# Altium PCB main.PcbDoc
Units mm, origin at the board's own origin, x right, y up, seen from the top; angles counter-clockwise.
Board outline 45 x 45 mm, 2 copper layers (Top Layer, Bottom Layer); 4 components, 8 nets, 17 pads, 2 vias.
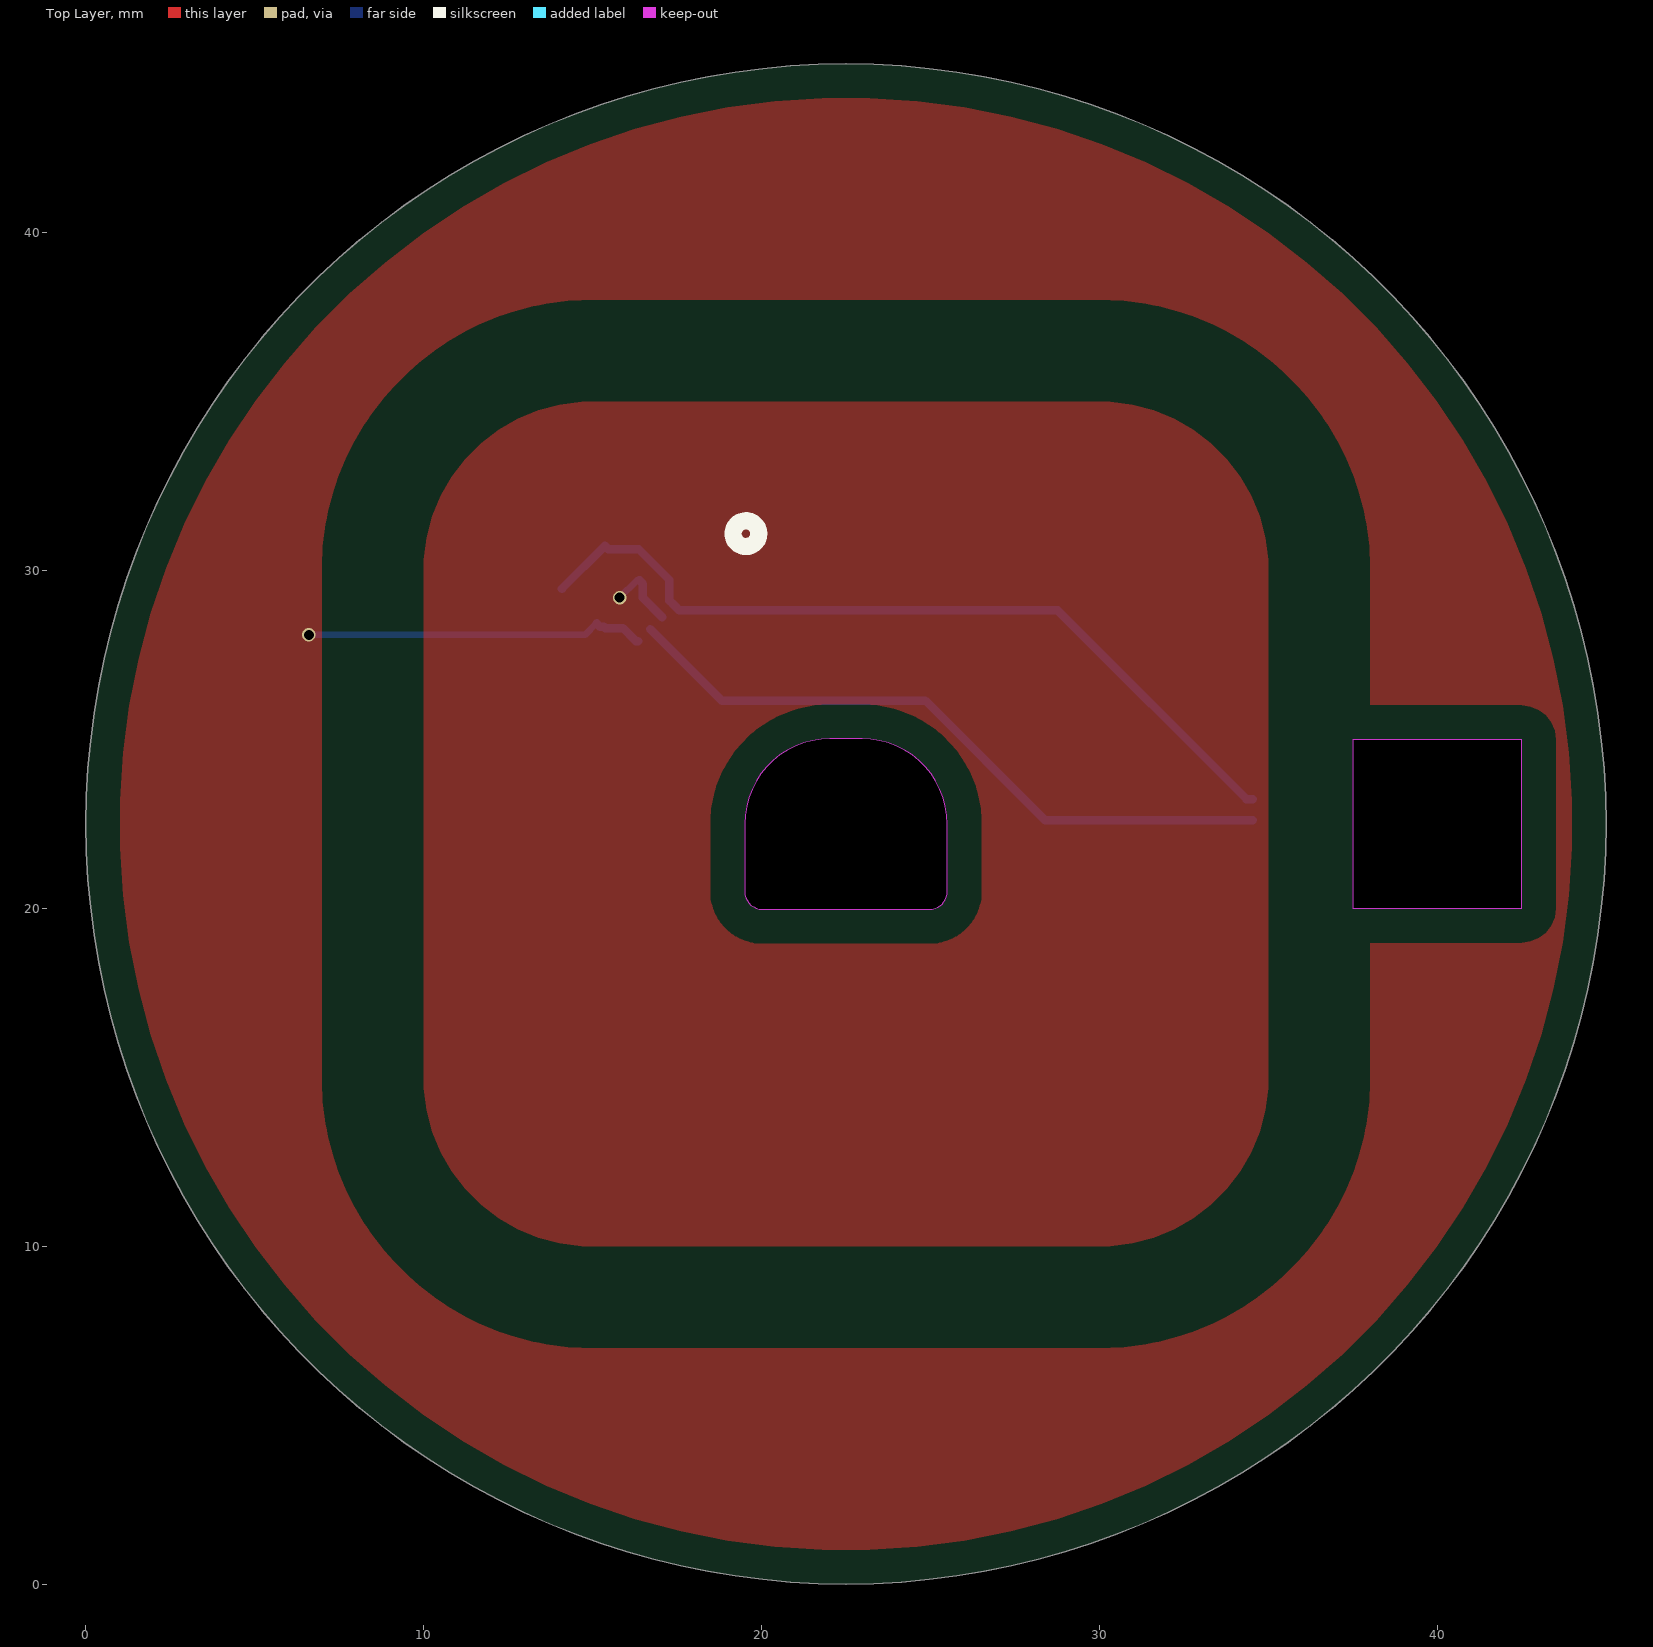
[diagram p0: Top Layer view]
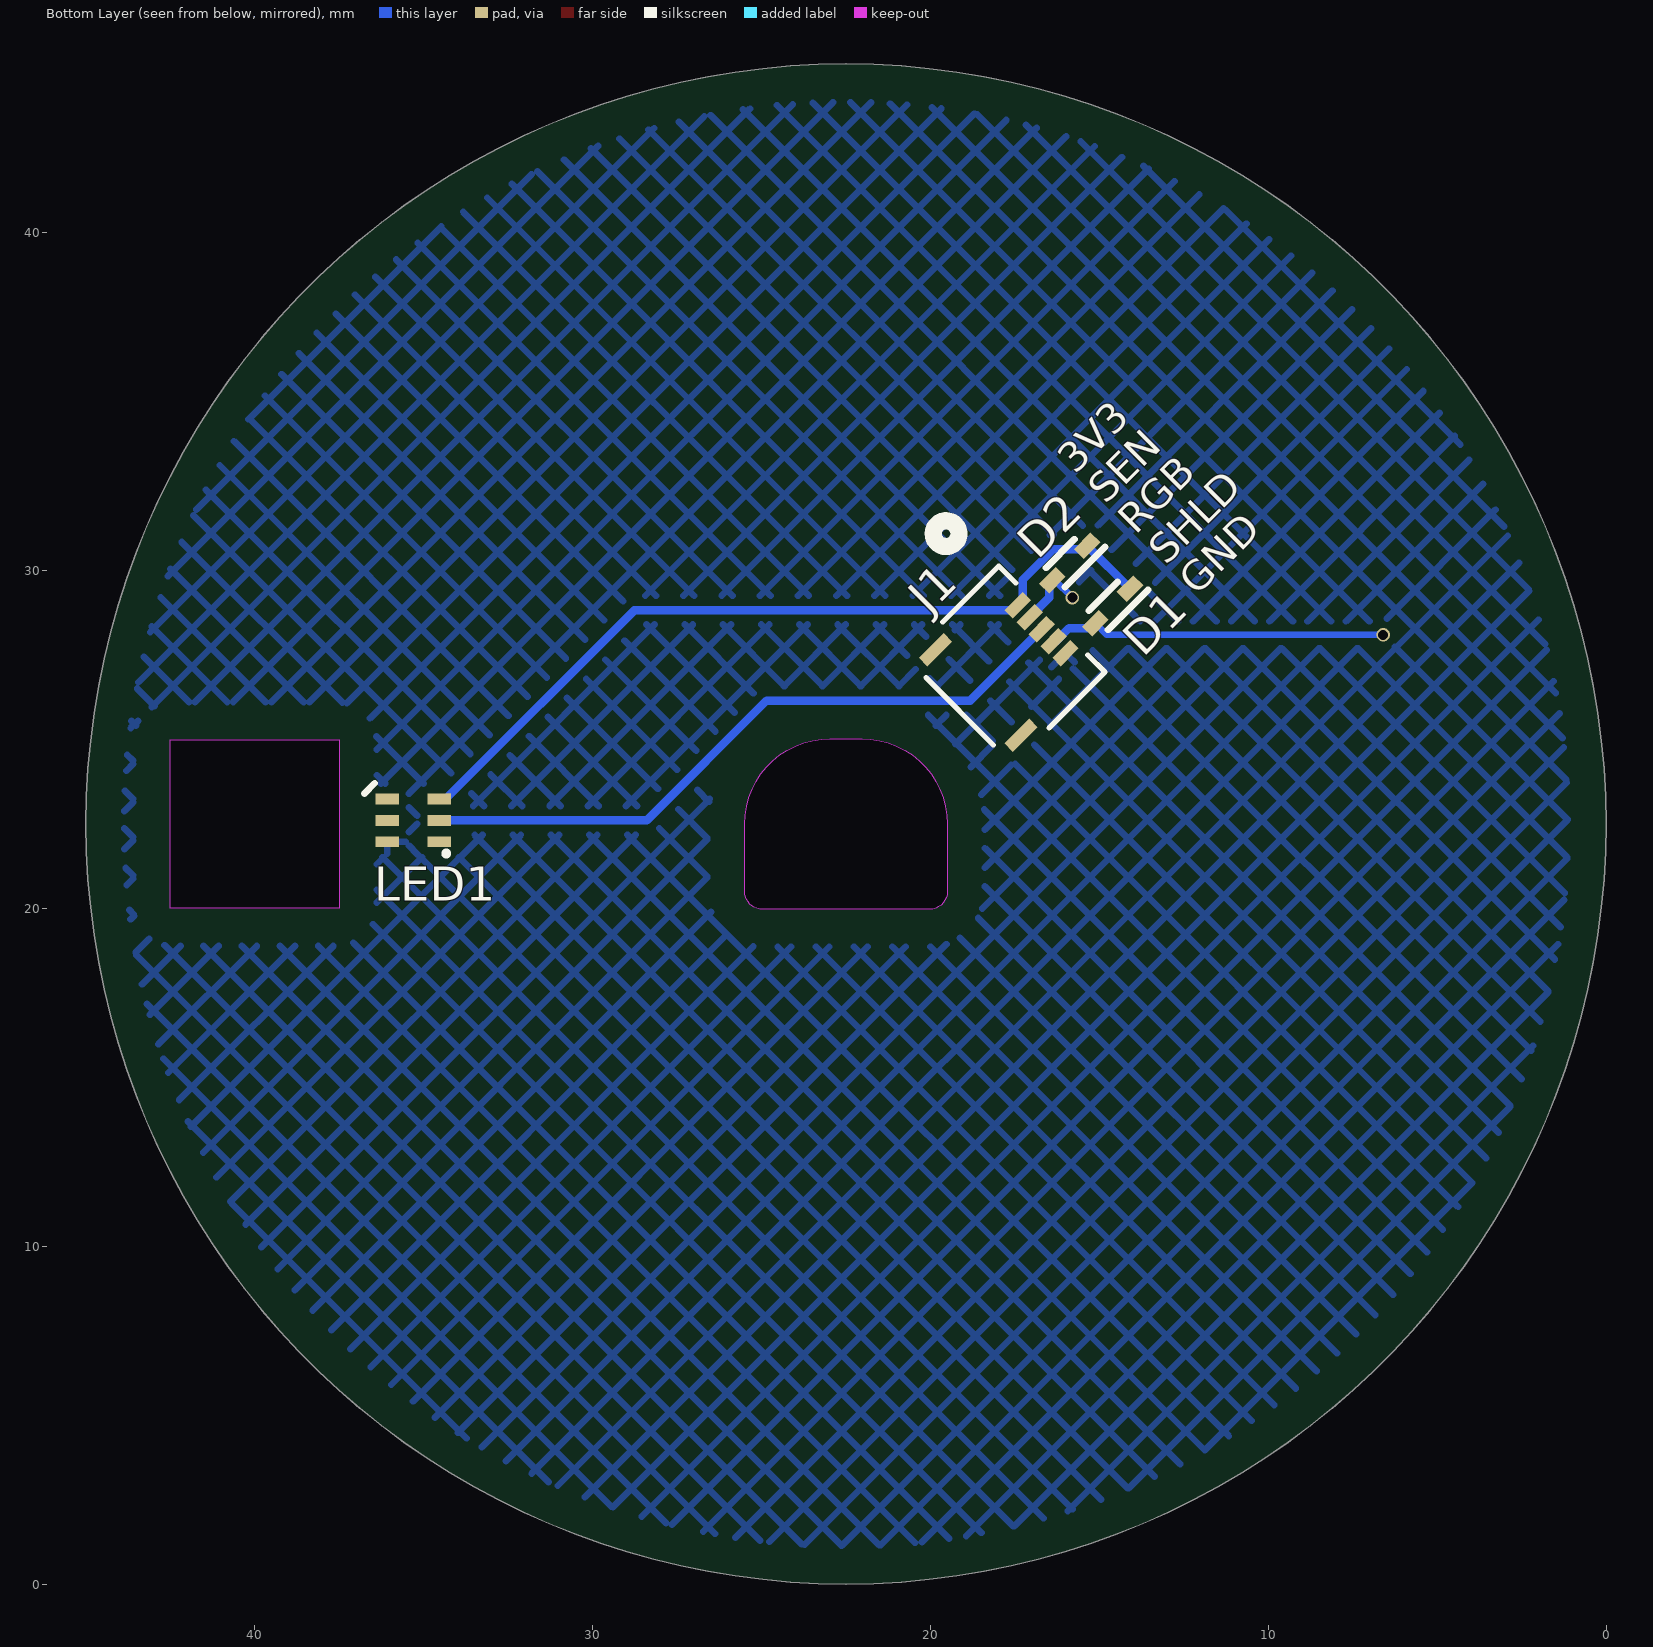
[diagram p1: Bottom Layer view, seen from below]
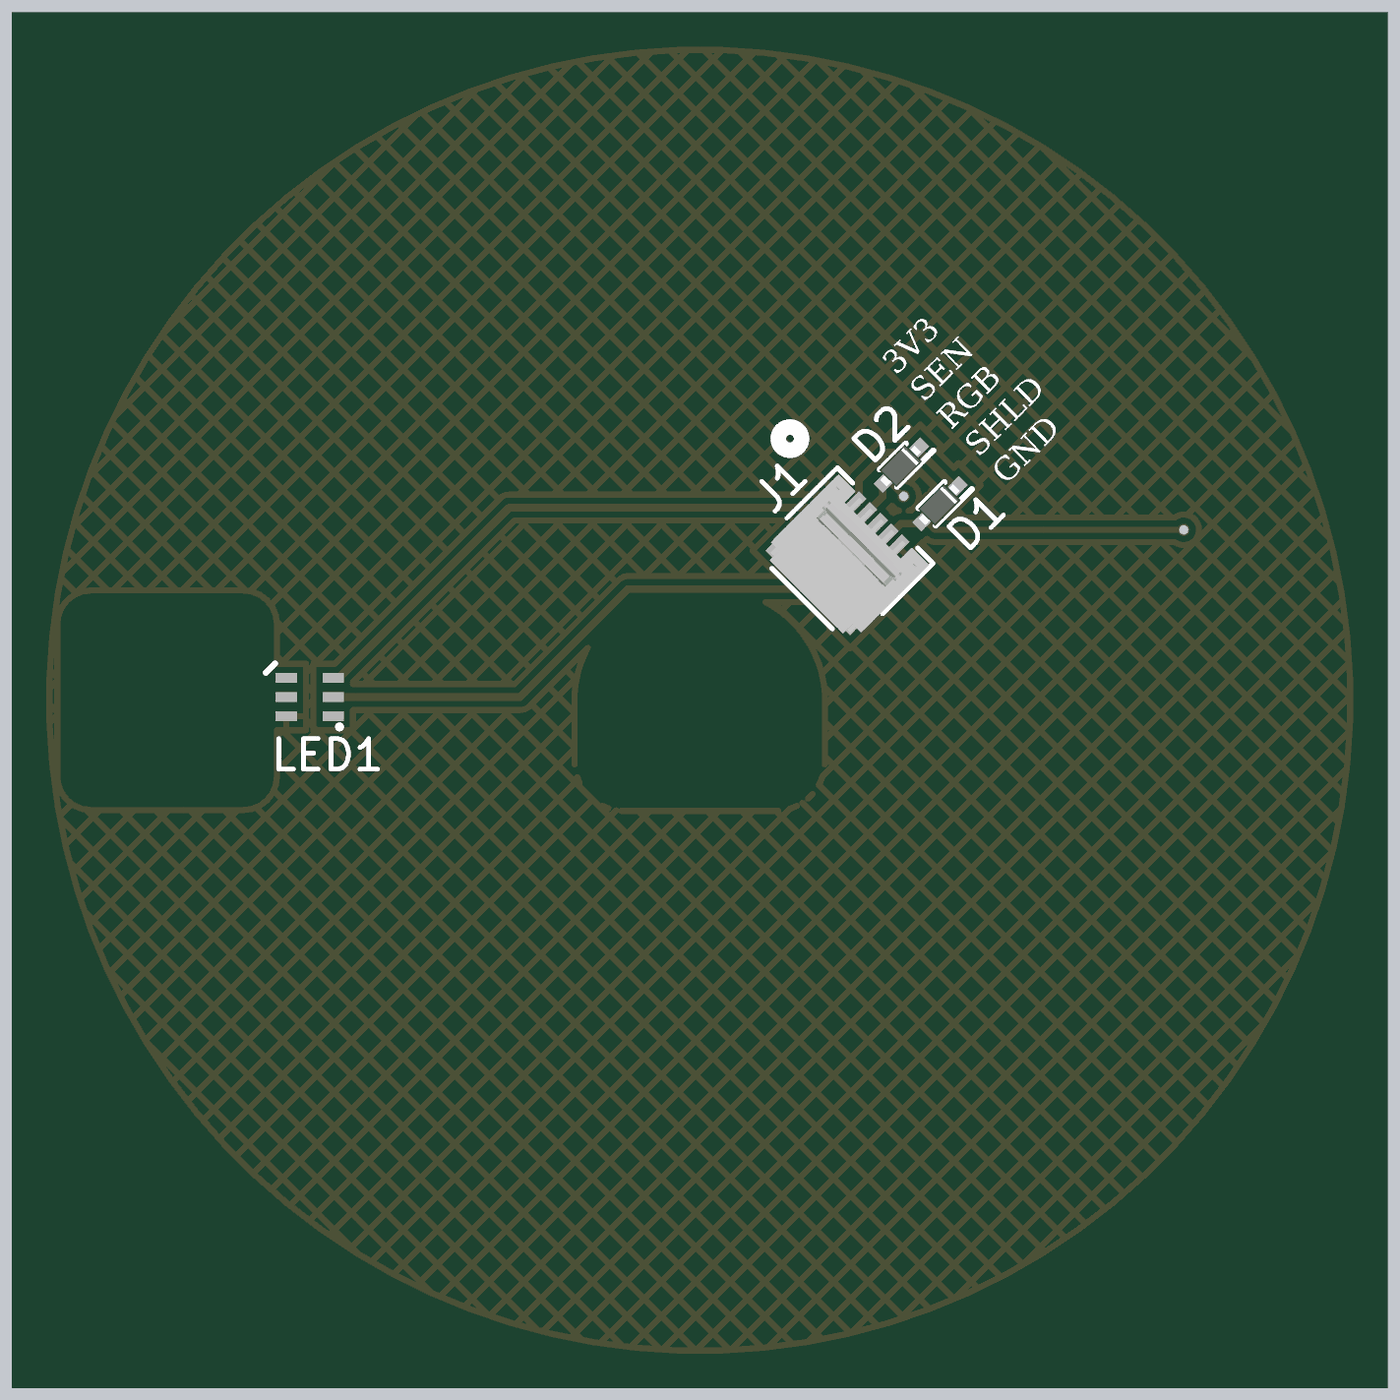
[diagram p2: 3D render of the assembled board from below, using the file's embedded part models]

## Layer stack, top to bottom
Top Solder: solder mask 0.0102, Solder Resist, Dk 3.5
Top Layer: signal copper 0.0356
Dielectric 1: dielectric 0.32, FR-4, Dk 4.8
Bottom Layer: signal copper 0.0356
Bottom Solder: solder mask 0.0102, Solder Resist, Dk 3.5

## Board outline
22.5,0 ccw(c22.5,22.5) 45,22.5 ccw(c22.5,22.5) 22.5,45 ccw(c22.5,22.5) 0,22.5 ccw(c22.5,22.5)
cut-out: 19.5,22.5 19.5,20.5 ccw(c20.025,20.5) 20.025,19.975 24.975,19.975 ccw(c24.975,20.5) 25.5,20.5 25.5,22.5 ccw(c22.975,22.5) 22.975,25.025 22.025,25.025 ccw(c22.025,22.5)
cut-out: 37.5,25 37.5,20 42.5,20 42.5,25

## Design rules (kind name [scope] priority, off if disabled: settings)
BoardOutlineClearance [All] p1: gap=1 ignorepadtopadclearanceinfootprint=FALSE
Clearance Clearance_sensor_shield [InNet('TSC_SEN') vs InNet('TSC_SHLD')] p1: gap=0.2 ignorepadtopadclearanceinfootprint=TRUE except(0.15: SMDPad-SMDPad; 0.28: Arc-THPad Arc-Hole Track-THPad Track-Hole; 0.3: THPad-Fill THPad-Poly THPad-Region; 0.4: Arc-Arc Arc-Track Track-Track; 0.45: THPad-THPad; 2: Arc-Fill Arc-Poly Arc-Region Track-Fill Track-Poly Track-Region; 3: Fill-Fill Fill-Poly Fill-Region Poly-Poly Poly-Region Region-Region)
Clearance [All] p2: gap=0.2 ignorepadtopadclearanceinfootprint=TRUE except(0.1: Track-Track Track-SMDPad; 0.15: SMDPad-SMDPad; 0.28: Track-THPad Track-Hole; 0.3: THPad-Fill THPad-Poly THPad-Region; 0.45: THPad-THPad)
HoleSize [All] p1: absolutevalues=TRUE maxlimit=6.3 minlimit=0.15 maxpercent=80.000 minpercent=20.000
MinimumAnnularRing [not isvia] p1: minimumring=0.2
MinimumSolderMaskSliver [All] p1: minsoldermaskwidth=0.1
PlaneClearance [All] p1: clearance=0.3
PlaneConnect [All] p1: pad.planeconnectstyle=Relief pad.reliefexpansion=0.2 pad.reliefentries=4 pad.reliefconductorwidth=0.3 pad.reliefairgap=0.3 via.planeconnectstyle=Direct via.reliefexpansion=0.508 via.reliefentries=4 via.reliefconductorwidth=0.254 via.reliefairgap=0.254
PolygonConnect [All] p1: thpad.connectstyle=Relief thpad.reliefconductorwidth=0.2 thpad.reliefentries=4 thpad.polygonreliefangle="90 Angle" thpad.airgapwidth=0.2 thpad.conductorbypadedge=TRUE thpad.mindistance=0.381 thpad.enablemindistance=FALSE smdpad.connectstyle=Relief smdpad.reliefconductorwidth=0.2 smdpad.reliefentries=4 smdpad.polygonreliefangle="90 Angle" smdpad.airgapwidth=0.2 smdpad.conductorbypadedge=TRUE smdpad.mindistance=0.381 smdpad.enablemindistance=FALSE via.connectstyle=Direct via.reliefconductorwidth=0.2 via.reliefentries=4 via.polygonreliefangle="90 Angle" via.airgapwidth=0.2
RoutingVias [All] p1: holewidth=0.3 width=0.5 viastyle="Through Hole" minholewidth=0.15 minwidth=0.25 maxholewidth=0.711 maxwidth=1.27
SilkToSilkClearance [All] p1: silktosilkclearance=0
SilkToSolderMaskClearance [IsPad] p1: minsilkscreentomaskgap=0.15 clearancetoexposedcopper=FALSE
SolderMaskExpansion SolderMaskExpansionVia [IsVia] p1: expansion=0 istentingtop=TRUE
SolderMaskExpansion [All] p2: expansion=0 istentingtop=FALSE
SupplyNets "Schematic Supply Nets_3" [InNet('3V3')] p1: voltage=0.000
SupplyNets "Schematic Supply Nets" [InNet('GND')] p2: voltage=0.000
Width [All] p1: maxlimit=1 minlimit=0.1 preferedwidth=0.2
24 further rules are at their usual default settings.

## Components (designator, comment, footprint, x,y, rotation, side; value= is the part's Value field where it differs from the comment)
D1 "BAS70KFILM" SODFL1608X70N 14.605,28.956 r315 bottom
D2 "BAS70KFILM" SODFL1608X70N 15.875,30.226 r315 bottom
J1 "5034800540" CONN_503480-0540_MOL 17.772,27.203 r225 bottom
LED1 "WS2816A-2121" ws2816a-2121 34.194,24.976 r0 bottom

## Footprints (in the part's own frame and the unit in brackets; to place one, negate y for a bottom-side part, rotate by r counter-clockwise, add the part's x,y. Pads: shape width x height; smd on the part's side, far side on the other; paste and mask are expansions set on the pad)
CONN_503480-0540_MOL [mil]
  rect 14x30 smd paste+0 mask+0: 1(-39.37,59.19) 2(-19.69,59.19) 3(0,59.19) 4(19.68,59.19) 5(39.37,59.19)
  rect 14x41 smd: 6(-70.47,-45.14) 7(70.47,-45.14)
  silkscreen extent -172,-76 87,76, body extent -80,-71 85,71, height 73
SODFL1608X70N [mm]
  rect 0.7x0.42 smd: 1(-0.725,0) 2(0.725,0)
  silkscreen extent -1.07,-0.4 0.6,0.4, body extent -0.76,-0.4 0.84,0.4, height 0.7
ws2816a-2121 [mm]
  rect 0.7x0.32 smd: 1(0.35,3) 2(0.35,2.37) 3(0.35,1.74) 4(1.89,1.74) 5(1.89,2.37) 6(1.89,3)
  silkscreen extent 0.12,1.27 2.56,3.37

## Part data
D1 D2: "STMicroelectronics BAS70KFILM, SMT Schottky Diode, 70V 70mA, 2-Pin SOD-523", Manufacturer_Name=STMicroelectronics, Mouser Part Number=511-BAS70KFILM, Arrow Part Number=BAS70KFILM, Arrow Price/Stock=https://www.arrow.com/en/products/bas70kfilm/stmicroelectronics?region=nac, Datasheet Link=https://www.st.com/resource/en/datasheet/bas70.pdf, Geometry.Height=0.7mm, Manufacturer_Part_Number=BAS70KFILM, Mouser Price/Stock=https://www.mouser.co.uk/ProductDetail/STMicroelectronics/BAS70KFILM?qs=jZi1jxfVU95GtldeDT2NyQ%3D%3D
J1: "Easy-On FFC/FPC Connector, 0.50mm Pitch, FBH1 Series, Right-Angle, Dual Contact, 1.00mm Height, 5 Circuits, Gold over Nickel Plating", Manufacturer_Name="Molex Connector Corporation", Copyright="Copyright (C) 2025 Ultra Librarian. All rights reserved.", Manufacturer_Part_Number=5034800540, RefDes=RefDes, Type=Type
LED1: Manufacturer_Part_Number=WS2816A-2121

## Via types
v1: diameter 0.4, hole 0.3, Top Layer to Bottom Layer, tented both sides, 2 vias

## Nets (pads, with @x,y where several pads share a name; then routed paths per layer and width w, separated by ;. In a path a pad name is that pad's centre, name@x,y a point inside that pad or via, vN(x,y) a via of type N, cw(c..) or ccw(c..) an arc to the next point about the centre after c; other vN are vias at no path point)
3V3: D1.1 D2.1 J1.1 LED1.3 | length 24.4
  Bottom Layer w0.254: D1.1 D2.1 15.461,30.64 16.36,30.64 17.273,29.727 17.273,29.117 J1.1 17.56,28.83 28.76,28.83 34.354,23.236 LED1.3
GND: J1.5 LED1.6
NetJ1_3: J1.3 LED1.2 | length 20.2
  Bottom Layer w0.254: J1.3 18.823,26.152 24.852,26.152 28.398,22.606 LED1.2
NetLED1_1: LED1.1
NetLED1_4: LED1.4
NetLED1_5: LED1.5
TSC_SEN: D2.2 J1.2 | length 2.2
  Bottom Layer w0.2: v1(15.8,29.2) 16.313,29.713 D2.2
  Bottom Layer w0.254: D2.2 16.487,29.614 16.487,29.196 J1.2
TSC_SHLD: D1.2 J1.4 | length 10.1
  Bottom Layer w0.2: v1(6.6,28.1) 14.774,28.1 D1.2
  Bottom Layer w0.254: D1.2 15.217,28.344 15.334,28.344 15.378,28.3 15.896,28.3 16.284,27.913 J1.4
pads on no net: J1.6 J1.7

## Polygon pours and split planes (outlines as drawn)
TSC_SHLD on Top Layer "TOUCH_SHIELD" (solid, pour order 3): 0,45 0,0 45,0 45,45
TSC_SEN on Top Layer "TOUCH_SENSOR" (solid, pour order 2): 10,30 10,15 ccw(c15,15) 15,10 30,10 ccw(c30,15) 35,15 35,30 ccw(c30,30) 30,35 15,35 ccw(c15,30)
GND on Bottom Layer "GND" (hatched 45Degree grid 0.8 track 0.2, pour order 4): 0,45 0,0 45,0 45,45

## Silkscreen, mask and mechanical layers (free items; w line width, h text height)
Bottom Overlay:
  text "3V3" at 15.509,32.621 h1.5 r315
  text "SEN" at 14.608,31.722 h1.5 r315
  text "RGB" at 13.708,30.822 h1.5 r315
  text "SHLD" at 12.808,29.922 h1.5 r315
  text "GND" at 11.909,29.021 h1.5 r315
Top Solder:
  region: 10,30 10,15 ccw(c15,15) 15,10 30,10 ccw(c30,15) 35,15 35,30 ccw(c30,30) 30,35 15,35 ccw(c15,30)
  text "鄭" at 22.1,41.58 h1.5
  text "泊" at 22.1,40.514 h1.5
  text "聲" at 22.1,39.375 h1.5
  text "Frictional AI / Touchpad / Ben Posheng Cheng" at 19,2.202 h1
Mechanical 1:
  circle w0.001: c22.5,22.5 r11.4
  circle w0.001: c16.5,22.5 r0.65
  circle w0.001: c28.5,22.5 r0.65
  circle w0.001: c22.5,28.5 r0.65
  circle w0.001: c22.5,16.5 r0.65
  circle w0.001: c27.096,17.904 r1
  circle w0.001: c17.904,27.096 r1
  circle w0.001: c22.5,22.5 r2.5
  circle w0.001: c22.5,22.5 r10.75
  lines w0.2: 0,22.5 45,22.5 ; 22.5,0 22.5,45
Board Shape:
  lines w0.2: 0,22.5 ccw(c22.5,22.5) 22.5,0 ccw(c22.5,22.5) 45,22.5 ccw(c22.5,22.5) 22.5,45 ccw(c22.5,22.5) 0,22.5 ; 19.5,20.5 ccw(c20.025,20.5) 20.025,19.975 24.975,19.975 ccw(c24.975,20.5) 25.5,20.5 25.5,22.5 ccw(c22.975,22.5) 22.975,25.025 22.025,25.025 ccw(c22.025,22.5) 19.5,22.5 19.5,20.5 ; 37.5,20 42.5,20 42.5,25 37.5,25 37.5,20